# EAGLE board BLE -- HM-10 -- Carduino Breakout v1.0.4 (EAGLE 6.4)
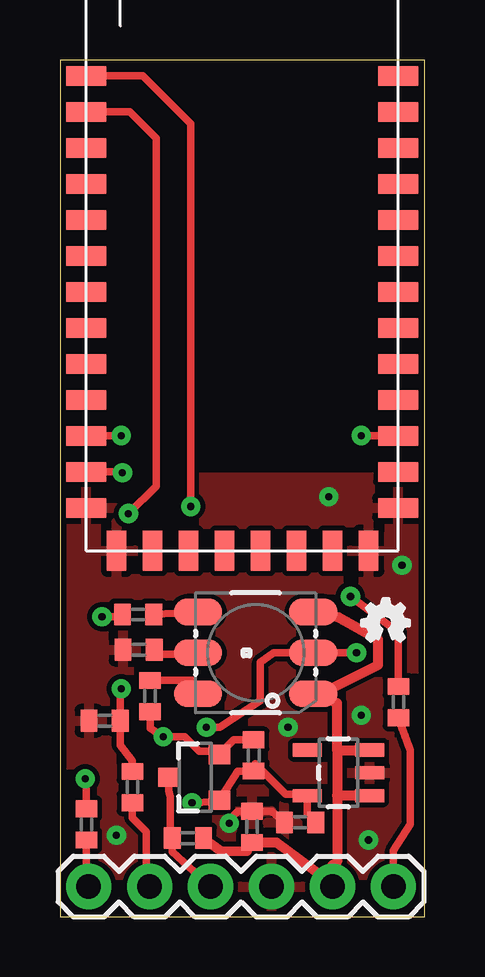
[diagram p0: board, top side]
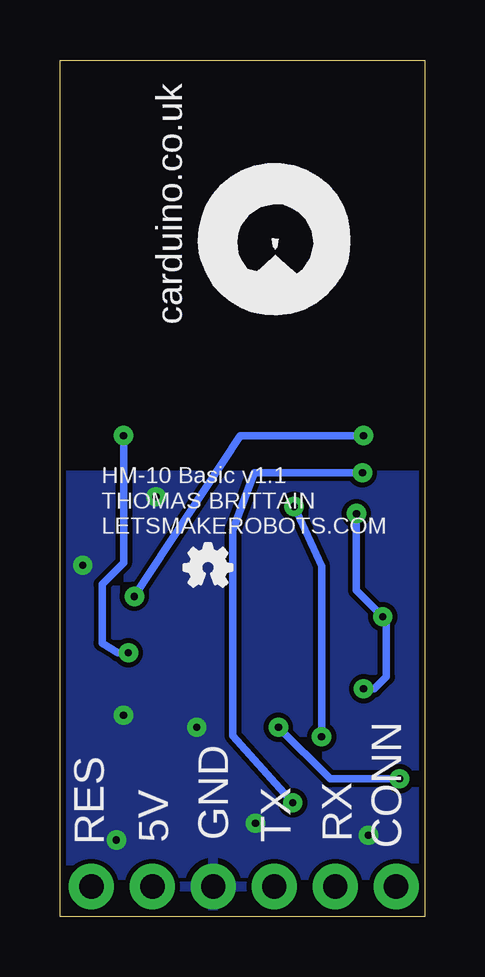
[diagram p1: board, bottom side, seen from below]

Size 15.2 x 35.7 mm. Coordinates in mm from the lower left corner, seen from the top.
Outline: 0,0 15.2,0 15.2,35.7 0,35.7 0,0
Copper layers (1*16): Top 0.035mm / dielectric 1.5mm / Bottom 0.035mm
Design rules "SparkFun (1)": minimum track width 8mil, minimum drill 20mil, track to track 8mil, track to pad 8mil, pad to pad 8mil, via to via 8mil, smd to smd 8mil, copper to edge 10mil, drill to drill 8mil, minimum pad ring 12mil, minimum via ring 10mil, stop-mask expansion 4mil, vias tented up to drill 25mil, thermal gap 10mil

## Footprints (pad centres in the part's own frame; a part is rotated, then mirrored left to right if it is on the bottom)
SOT23-3 = smd 0.8 x 0.9: 1 -0.95,-1; 2 0.95,-1; 3 0,1.1
C0402 = smd 0.7 x 0.9: 1 -0.65,0; 2 0.65,0
1X06 = drill 1.016 pad 1.88: 1 0,0; 2 2.54,0; 3 5.08,0; 4 7.62,0; 5 10.16,0; 6 12.7,0
LED-TRICOLOR-5050 = smd 2 x 1.1: 1 -2.4,1.7; 2 -2.4,0; 3 -2.4,-1.7; 4 2.4,-1.7; 5 2.4,0; 6 2.4,1.7
R0402 = smd 0.7 x 0.9: 1 -0.65,0; 2 0.65,0
SOT23-5 = smd 0.55 x 1.2: 1 -0.95,-1.3; 2 0,-1.3; 3 0.95,-1.3; 4 0.95,1.3; 5 -0.95,1.3
BLE-HM-10 = smd 1.676 x 0.813: 3.3V 0,3.29; AIO0 0,7.79; AIO1 0,6.29; GND1 0,1.79; GND4 13,1.79; PCM_CLK 0,13.79; PCM_IN 0,10.79; PCM_OUT 0,12.29; PCM_SYNC 0,9.29; PIO0 13,3.29; PIO1 13,4.79; PIO2 13,6.29; PIO3 13,7.79; PIO4 13,9.29; PIO5 13,10.79; PIO6 13,12.29; PIO7 13,13.79; PIO8 13,15.29; PIO9 13,16.79; PIO10 13,18.29; PIO11 13,19.79; RESET 0,4.79; UART_CTS 0,16.79; UART_RTS 0,15.29; UART_RX 0,18.29; UART_TX 0,19.79 | smd 0.813 x 1.676: GND2 1.27,0; GND3 11.77,0; SPI_CLK 8.77,0; SPI_CSB 4.27,0; SPI_MISO 7.27,0; SPI_MOSI 5.77,0; USB_D+ 10.27,0; USB_D- 2.77,0

## Placement (x,y rotation side)
BSS138  MOSFET-NCHANNELSMD  [SOT23-3]  5.64,5.81 90 top
C1  1uF  [C0402]  8,3.75 90 top
C2  1uF  [C0402]  10,3.93 180 top
JP1  [1X06]  1.19,1.26 0 top
LED1  LED-TRICOLOR-5050NO_IC  [LED-TRICOLOR-5050]  8.15,11 180 top
R1  470  [R0402]  3.75,9.2 90 top
R2  470  [R0402]  3.25,12.6 0 top
R3  10k  [R0402]  3.02,5.4 90 top
R4  20k  [R0402]  1.86,8.17 180 top
R5  10k  [R0402]  5.33,3.28 0 top
R6  10k  [R0402]  8.07,6.72 270 top
R7  470  [R0402]  3.28,11.13 0 top
R8  10K  [R0402]  1.1,3.85 90 top
R9  10K  [R0402]  14.1,8.95 270 top
U1  V_REG_LDOSMD  [SOT23-5]  11.6,6 90 top
U$1  BLE-HM-10  [BLE-HM-10]  1.09,15.25 0 top
U$2  [OSHW_FILLX70_NOTEXT]  12.57,11.48 0 top
U$3  [OSHW_FILLX70_NOTEXT]  12.57,11.48 0 top
U$4  [OSHW_FILLX70_NOTEXT]  10.03,13.78 0 bottom

## Library data of the parts
BSS138 U1 = SparkFun
C1 C2 R1-R9 = resistor
JP1 = SparkFun-Connectors
LED1 = SparkFun-LED
U$1 = Random parts
U$2-U$4 = ohw-logo

## Nets
3_3V: BSS138.1 C2.1 R6.2 U1.5 U$1.3.3V
5V: C1.1 JP1.5 LED1.1 LED1.3 R5.2 U1.1 U1.3
CONN_PIN: LED1.2 R8.2 U$1.PIO1
CONN_STAT: JP1.1 R8.1
GND: C1.2 C2.2 JP1.4 R4.2 R7.1 U1.2 U$1.GND1 U$1.GND2 U$1.GND3 U$1.GND4
HVTX->LVRX: R2.1 R3.2 R4.1 U$1.UART_RX
LVRX->HVTX: BSS138.2 R1.1 R6.1 U$1.UART_TX
N$2: LED1.6 R1.2
N$3: LED1.4 R2.2
N$26: LED1.5 R7.2
RES: R9.1 U$1.RESET
RES_C: JP1.6 R9.2
RX: JP1.2 R3.1
TX: BSS138.3 JP1.3 R5.1

## Tracks (layer width: path | path; a pad name or v marks a point on that pad's centre or on a via)
3_3V  (via drill 0.3)
  Top 0.305: U$1.3.3V 2.46,18.54 v2.6,18.5 | v5.5,4.75 6.4,4.8 BSS138.1 7.4,6.07 R6.2 8.13,6.37 9.4,5.1 10.25,5.1 U1.5 10.3,4.29 C2.1
  Bottom 0.305: v2.6,18.5 7.1,18.5 8,16.1 8,7.55 v5.5,4.75
5V
  Top 0.305: 7.95,3.05 C1.1 | LED1.1 10.85,9.3 | 11.55,12.5 10.75,12.5 LED1.3
  Top 0.406: R5.2 6.72,2.73 7.8,2.75 7.95,3.05 | C1.1 9.01,3.1 10.93,1.68 | 10.93,1.68 JP1.5 11.35,2.15 | 11.55,6.95 U1.3 | 11.55,6.95 11.55,8.9 LED1.1 | 10.85,9.3 13.25,10.5 13.25,11.55 11.55,12.5 | 11.55,6.95 11.55,5.05 | 11.55,5.05 11.55,2.3 10.93,1.68 | U1.1 11.55,5.05
CONN_PIN  (via drill 0.3)
  Top 0.305: R8.2 1.1,5.7 v1.05,5.75 | v6.1,7.9 6.65,7.9 8.35,9 8.35,10.6 8.9,11 LED1.2 v12.35,11 | U$1.PIO1 v12.56,20.04 v12.55,20.05
  Bottom 0.305: v1.05,5.75 3.95,5.75 v6.1,7.9 | v12.55,20.05 12.55,14.75 13.45,13.85 13.45,11.4 12.8,11 v12.35,11
CONN_STAT
  Top 0.305: JP1.1 1.19,1.29 1.1,2.1 R8.1
GND  (via drill 0.3)
  Top 0.305: C2.2 8.82,4.4 C1.2 7.41,4.39 7.05,4.03 v7.05,3.9
  other vias: 12.85,3.2 2.35,3.4 12.55,8.4 14.25,14.65 11.2,17.5 9.5,7.9
  pour Bottom: 0.2,-0.83 15.2,-0.83 14.95,18.39 0.15,18.39
  pour Top: 0.15,18.3 0.05,-0.82 15.2,-0.82 14.9,18.3
HVTX->LVRX  (via drill 0.3)
  Top 0.305: U$1.UART_RX 2.91,33.54 4,32.45 4,17.95 v2.85,16.8 | v1.75,12.5 2.5,12.5 R2.1 | v2.55,9.5 2.51,9.26 R4.1 2.5,7.15 3,6.5 3.02,6.5 R3.2
  Bottom 0.305: v2.85,16.8 2.85,13.6 v1.75,12.5 1.6,12.35 1.6,10 2.1,9.5 v2.55,9.5
LVRX->HVTX  (via drill 0.3)
  Top 0.305: R6.1 7.25,7.37 BSS138.2 6.5,6.9 5.8,6.9 5.2,7.5 v4.3,7.5 3.75,7.85 R1.1 | v5.45,17.1 5.45,33.05 3.45,35.05 U$1.UART_TX
  Bottom 0.305: v4.3,7.5 4.3,14.6 v5.45,17.1
N$2
  Top 0.305: LED1.6 5.5,9.85 R1.2
N$3
  Top 0.305: LED1.4 R2.2
N$26
  Top 0.305: LED1.5 5.7,10.95 4.1,10.95 R7.2
RES  (via drill 0.3)
  Top 0.305: U$1.RESET 2.34,20.04 v2.55,20.05 | v12.1,13.35 14.1,11.85 R9.1
  Bottom 0.305: v2.55,20.05 7.7,20.05 v12.1,13.35
RES_C
  Top 0.305: JP1.6 13.89,2.74 14.6,3.85 14.6,6.95 R9.2
RX
  Top 0.305: R3.1 3.02,4.13 3.6,3.55 3.6,1.39 JP1.2
TX
  Top 0.305: JP1.3 4.68,2.71 R5.1 4.6,3.5 4.6,5 4.54,5.26 BSS138.3

## Text on the board
bNames: carduino.co.uk | HM-10 Basic v1.1 / THOMAS BRITTAIN / LETSMAKEROBOTS.COM | CONN | RX | TX | GND | 5V | RES